# Altium PCB Microneedle_Patch_Mirrored_V2.PcbDoc
Units mm, origin at the board's own origin, x right, y up, seen from the top; angles counter-clockwise.
Board outline 28.75 x 93 mm, 2 copper layers (Top, Bottom), stack 0.137 mm thick; 33 components, 33 nets, 708 pads, 44 vias.
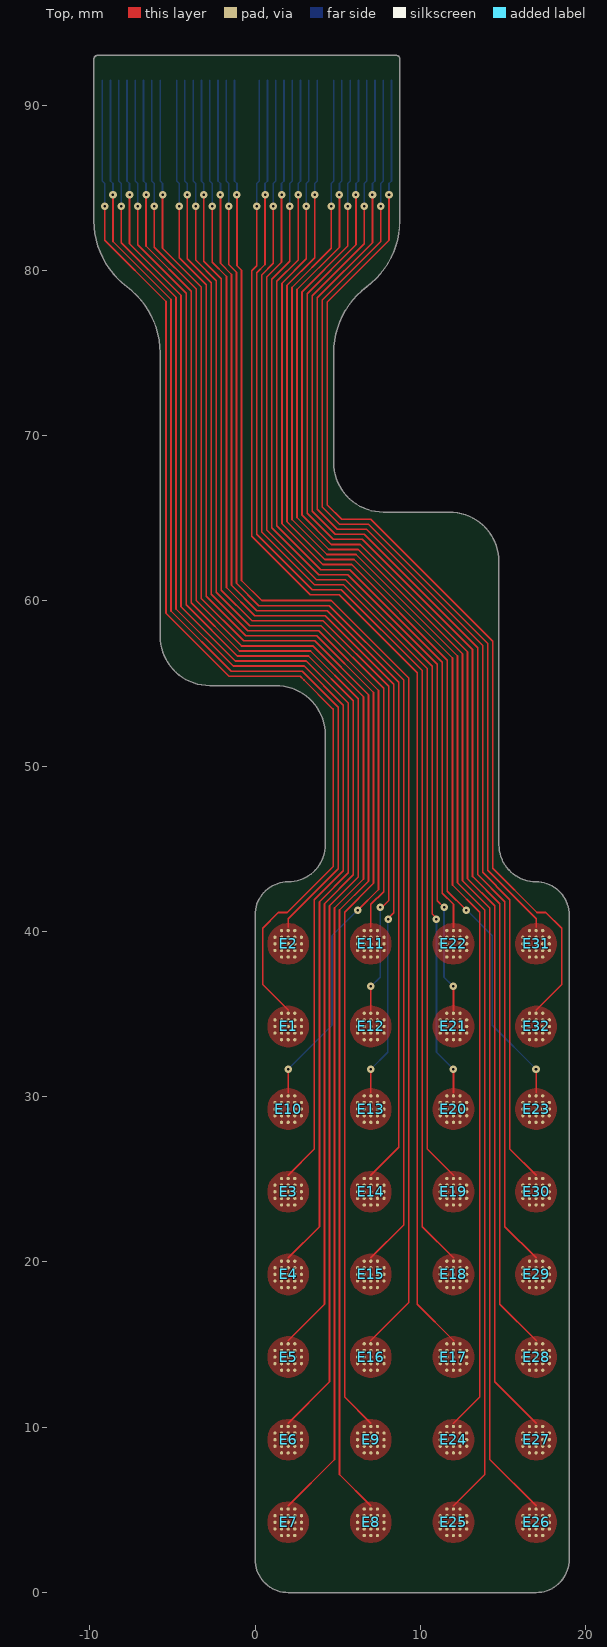
[diagram p0: Top view]
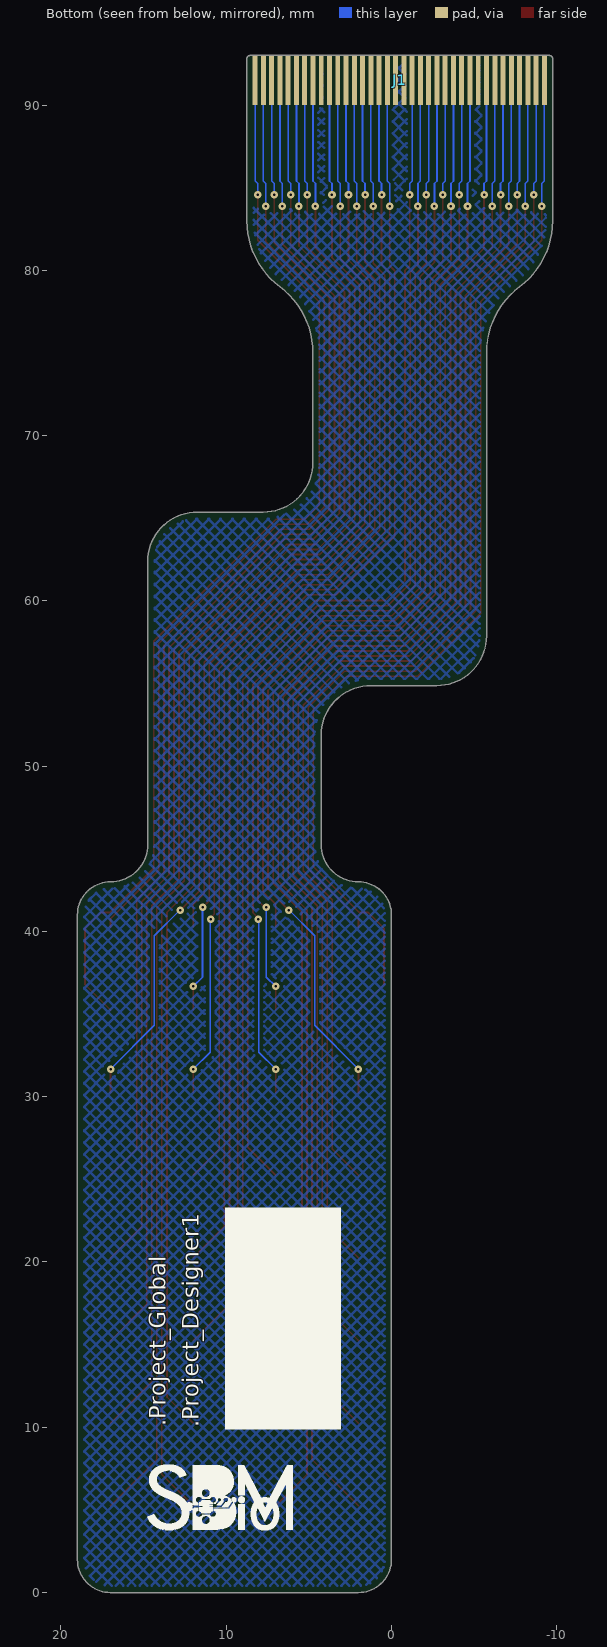
[diagram p1: Bottom view, seen from below]
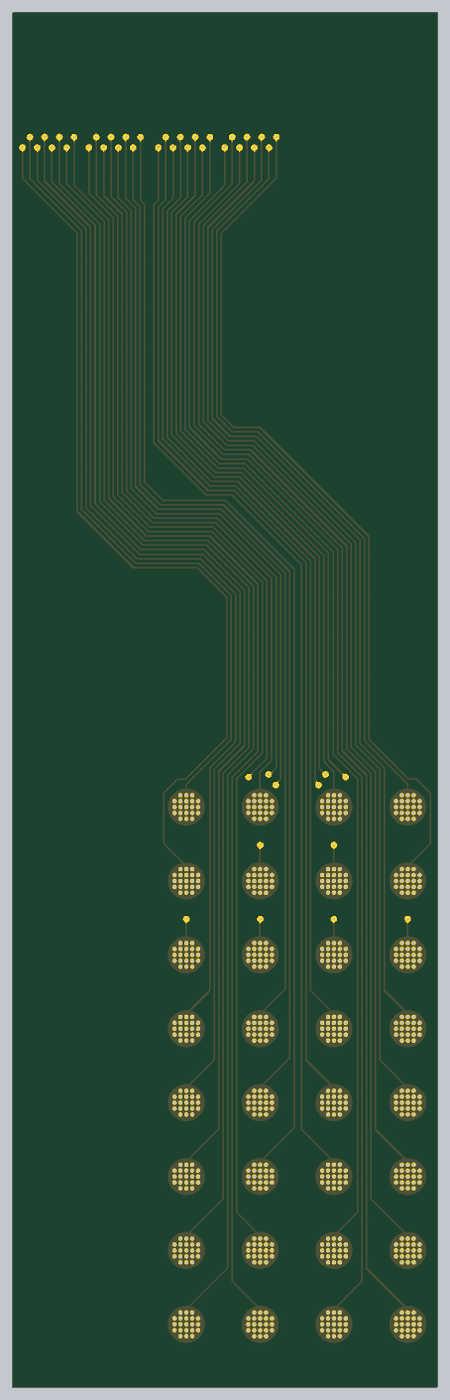
[diagram p2: 3D render of the assembled board from above, using the file's embedded part models]

## Layer stack, top to bottom
Board Layer Stack Top Coverlay: solder mask 0.025, Polymide, Dk 3.4
Adhesive 3: prepreg 0.025, Adhesive, Dk 3.3
Top: signal copper 0.018
Dielectric 1: core 0.013, Composite dielectric, Dk 3.3
Dielectric 3: core 0.025, Polymide, Dk 3.4
Dielectric 2: core 0.013, Composite dielectric, Dk 3.3
Bottom: signal copper 0.018
Adhesive 2: prepreg 0.025, Adhesive, Dk 3.3
Board Layer Stack Bottom Coverlay: solder mask 0.025, Polymide, Dk 3.4

## Board outline
2,0 cw(c2,2) 0,2 0,41 cw(c2,41) 2,43 ccw(c2,45.25) 4.25,45.25 4.25,51.875 ccw(c1.25,51.875) 1.25,54.875 -2.75,54.875 cw(c-2.75,57.875) -5.75,57.875 -5.75,75 ccw(c-10.75,75) -7.75,79 cw(c-4.75,83) -9.75,83 -9.75,92.8 cw(c-9.55,92.8) -9.55,93 8.55,93 cw(c8.55,92.8) 8.75,92.8 8.75,83 cw(c3.75,83) 6.75,79 ccw(c9.75,75) 4.75,75 4.75,68.375 ccw(c7.75,68.375) 7.75,65.375 11.75,65.375 cw(c11.75,62.375) 14.75,62.375 14.75,45.25 ccw(c17,45.25) 17,43 cw(c17,41) 19,41 19,2 cw(c17,2) 17,0

## Design rules (kind name [scope] priority, off if disabled: settings)
BoardOutlineClearance ZIF_BoardEdge [InPadClass('ZIF_Pads')] p1: gap=0.305 ignorepadtopadclearanceinfootprint=FALSE except(0: SMDPad-OutlineEdge)
BoardOutlineClearance [All] p2: gap=0.305 ignorepadtopadclearanceinfootprint=FALSE except(0: SMDPad-OutlineEdge)
Clearance [All] p1: gap=0.203 ignorepadtopadclearanceinfootprint=TRUE except(0.127: Arc-SMDPad Track-SMDPad SMDPad-SMDPad)
ComponentClearance [All] p1: gap=0.102 collisioncheckmode=3 verticalgap=0.102 showdistances=FALSE
HoleSize [All] p1: absolutevalues=TRUE maxlimit=25.4 minlimit=0.102 maxpercent=80.000 minpercent=20.000
HoleToHoleClearance [All] p1: gap=0.254 allowstackedmicrovias=FALSE
MinimumSolderMaskSliver [All] p1: minsoldermaskwidth=0.1
PlaneClearance [All] p1: clearance=0.152
PlaneConnect [All] p1: pad.planeconnectstyle=Relief pad.reliefexpansion=0.508 pad.reliefentries=4 pad.reliefconductorwidth=0.254 pad.reliefairgap=0.254 via.planeconnectstyle=Direct via.reliefexpansion=0.508 via.reliefentries=4 via.reliefconductorwidth=0.254 via.reliefairgap=0.254
PolygonConnect [All] p1: thpad.connectstyle=Relief thpad.reliefconductorwidth=0.254 thpad.reliefentries=4 thpad.polygonreliefangle="90 Angle" thpad.airgapwidth=0.254 smdpad.connectstyle=Direct smdpad.reliefconductorwidth=0.254 smdpad.reliefentries=4 smdpad.polygonreliefangle="90 Angle" smdpad.airgapwidth=0.254 via.connectstyle=Direct via.reliefconductorwidth=0.254 via.reliefentries=4 via.polygonreliefangle="90 Angle" via.airgapwidth=0.254
RoutingVias [All] p1: holewidth=0.152 width=0.457 viastyle="Through Hole" minholewidth=0.152 minwidth=0.457 maxholewidth=0.152 maxwidth=0.457
SilkToSilkClearance [All] p1: silktosilkclearance=0.102
SilkToSolderMaskClearance [IsPad] p1: minsilkscreentomaskgap=0.051 clearancetoexposedcopper=FALSE
SolderMaskExpansion [All] p1: expansion=0.051 istentingtop=FALSE
SupplyNets "Schematic Supply Nets" [InNet('GND')] p1: voltage=0.000
Width [All] p1: maxlimit=0.102 minlimit=0.102 preferedwidth=0.102 minimp=50.000000 maximp=50.000000 favimp=50.000000
22 further rules are at their usual default settings.

## Components (designator, comment, footprint, x,y, rotation, side; value= is the part's Value field where it differs from the comment)
E1 "UNeedle" UNeedle 2,34.25 r0 top
E2 "UNeedle" UNeedle 2,39.25 r0 top
E3 "UNeedle" UNeedle 2,24.25 r0 top
E4 "UNeedle" UNeedle 2,19.25 r0 top
E5 "UNeedle" UNeedle 2,14.25 r0 top
E6 "UNeedle" UNeedle 2,9.25 r0 top
E7 "UNeedle" UNeedle 2,4.25 r0 top
E8 "UNeedle" UNeedle 7,4.25 r0 top
E9 "UNeedle" UNeedle 7,9.25 r0 top
E10 "UNeedle" UNeedle 2,29.25 r0 top
E11 "UNeedle" UNeedle 7,39.25 r0 top
E12 "UNeedle" UNeedle 7,34.25 r0 top
E13 "UNeedle" UNeedle 7,29.25 r0 top
E14 "UNeedle" UNeedle 7,24.25 r0 top
E15 "UNeedle" UNeedle 7,19.25 r0 top
E16 "UNeedle" UNeedle 7,14.25 r0 top
E17 "UNeedle" UNeedle 12,14.25 r0 top
E18 "UNeedle" UNeedle 12,19.25 r0 top
E19 "UNeedle" UNeedle 12,24.25 r0 top
E20 "UNeedle" UNeedle 12,29.25 r90 top
E21 "UNeedle" UNeedle 12,34.25 r0 top
E22 "UNeedle" UNeedle 12,39.25 r90 top
E23 "UNeedle" UNeedle 17,29.25 r90 top
E24 "UNeedle" UNeedle 12,9.25 r90 top
E25 "UNeedle" UNeedle 12,4.25 r90 top
E26 "UNeedle" UNeedle 17,4.25 r90 top
E27 "UNeedle" UNeedle 17,9.25 r90 top
E28 "UNeedle" UNeedle 17,14.25 r90 top
E29 "UNeedle" UNeedle 17,19.25 r90 top
E30 "UNeedle" UNeedle 17,24.25 r90 top
E31 "UNeedle" UNeedle 17,39.25 r0 top
E32 "UNeedle" UNeedle 17,34.25 r90 top
J1 "3-2492104-6" Fingers_36POS -0.5,91.5 r0 bottom

## Footprints (in the part's own frame and the unit in brackets; to place one, negate y for a bottom-side part, rotate by r counter-clockwise, add the part's x,y. Pads: shape width x height; smd on the part's side, far side on the other; paste and mask are expansions set on the pad)
Fingers_36POS [mm]
  rect 0.3x3 smd mask+0: 1(-8.75,0) 2(-8.25,0) 3(-7.75,0) 4(-7.25,0) 5(-6.75,0) 6(-6.25,0) 7(-5.75,0) 8(-5.25,0) 9(-4.75,0) 10(-4.25,0) 11(-3.75,0) 12(-3.25,0) 13(-2.75,0) 14(-2.25,0) 15(-1.75,0) 16(-1.25,0) 17(-0.75,0) 18(-0.25,0) 19(0.25,0) 20(0.75,0) 21(1.25,0) 22(1.75,0) 23(2.25,0) 24(2.75,0) 25(3.25,0) 26(3.75,0) 27(4.25,0) 28(4.75,0) 29(5.25,0) 30(5.75,0) 31(6.25,0) 32(6.75,0) 33(7.25,0) 34(7.75,0) 35(8.25,0) 36(8.75,0)
UNeedle [mm]
  round 0.2 smd paste+0 mask+0.05: 1(-0.8,-0.4) 1(-0.8,0) 1(-0.8,0.4) 1(-0.4,-0.8) 1(-0.4,-0.4) 1(-0.4,0) 1(-0.4,0.4) 1(-0.4,0.8) 1(0,-0.8) 1(0,-0.4) 1(0,0) 1(0,0.4) 1(0,0.8) 1(0.4,-0.8) 1(0.4,-0.4) 1(0.4,0) 1(0.4,0.4) 1(0.4,0.8) 1(0.8,-0.4) 1(0.8,0) 1(0.8,0.4)
  body extent -0.82,-0.82 0.82,0.82, height 0.4

## Part data
J1: library part CON_FINGERS_36POS, GRAMS Lib Spec=2.7

## Via types
v1: diameter 0.457, hole 0.152, Top to Bottom, 44 vias

## Nets (pads, with @x,y where several pads share a name; then routed paths per layer and width w, separated by ;. In a path a pad name is that pad's centre, name@x,y a point inside that pad or via, vN(x,y) a via of type N, cw(c..) or ccw(c..) an arc to the next point about the centre after c; other vN are vias at no path point)
GND: J1.9 J1.18 J1.19 J1.28
Input1: E1.1 J1.1 | length 67.3
  Top w0.102: v1(-9.1,83.871) -9.1,81.814 -5.394,78.109 -5.394,59.261 -1.58,55.446 2.721,55.446 2.955,55.212 4.624,53.543 4.724,53.442 4.724,43.924 1.947,41.147 1.408,41.147 0.457,40.196 0.457,36.793 2,35.25
  Bottom w0.102: J1.1 -9.25,85.4 -9.1,85.25 v1(-9.1,83.871)
Input2: E2.1 J1.2 | length 60.7
  Top w0.102: v1(-8.6,84.582) -8.6,81.745 -5.09,78.235 -5.09,59.387 -1.454,55.751 2.847,55.751 5.03,53.568 5.03,43.799 2,40.769 2,40.25
  Bottom w0.102: J1.2 -8.75,85.4 -8.6,85.25 v1(-8.6,84.582)
Input3: E3.1 J1.3 | length 75.8
  Top w0.102: v1(-8.1,83.871) -8.1,81.677 -4.785,78.361 -4.785,59.513 -1.327,56.056 2.973,56.056 5.334,53.695 5.334,43.672 3.586,41.924 3.586,26.836 2,25.25
  Bottom w0.102: J1.3 -8.25,85.4 -8.1,85.25 v1(-8.1,83.871)
Input4: E4.1 J1.4 | length 80.8
  Top w0.102: v1(-7.6,84.582) -7.6,81.608 -4.48,78.488 -4.48,59.639 -1.201,56.36 3.1,56.36 5.639,53.821 5.639,43.546 3.89,41.797 3.89,22.14 2,20.25
  Bottom w0.102: J1.4 -7.75,85.4 -7.6,85.25 v1(-7.6,84.582)
Input5: E5.1 J1.5 | length 85.9
  Top w0.102: v1(-7.1,83.871) -7.1,81.539 -4.175,78.614 -4.175,59.766 -1.075,56.665 3.226,56.665 5.944,53.947 5.944,43.42 4.195,41.671 4.195,17.445 2,15.25
  Bottom w0.102: J1.5 -7.25,85.4 -7.1,85.25 v1(-7.1,83.871)
Input6: E6.1 J1.6 | length 90.9
  Top w0.102: v1(-6.6,84.582) -6.6,81.47 -3.87,78.74 -3.87,59.892 -0.949,56.97 3.352,56.97 6.249,54.073 6.249,43.294 4.5,41.545 4.5,12.75 2,10.25
  Bottom w0.102: J1.6 -6.75,85.4 -6.6,85.25 v1(-6.6,84.582)
Input7: E7.1 J1.7 | length 96
  Top w0.102: v1(-6.1,83.871) -6.1,81.401 -3.566,78.866 -3.566,60.018 -0.822,57.275 3.478,57.275 6.554,54.2 6.554,43.167 4.805,41.418 4.805,8.055 2,5.25
  Bottom w0.102: J1.7 -6.25,85.4 -6.1,85.25 v1(-6.1,83.871)
Input8: E8.1 J1.8 | length 95.5
  Top w0.102: v1(-5.6,84.582) -5.6,81.332 -3.261,78.993 -3.261,60.144 -0.696,57.58 3.605,57.58 6.858,54.326 6.858,43.041 5.11,41.292 5.11,7.14 7,5.25
  Bottom w0.102: J1.8 -5.75,85.4 -5.6,85.25 v1(-5.6,84.582)
Input9: E9.1 J1.10 | length 90.1
  Top w0.102: v1(-4.6,83.871) -4.6,80.763 -2.956,79.119 -2.956,60.271 -0.57,57.884 3.731,57.884 7.163,54.452 7.163,42.915 5.414,41.166 5.414,11.836 7,10.25
  Bottom w0.102: J1.10 -4.75,85.4 -4.6,85.25 v1(-4.6,83.871)
Input10: E10.1 J1.11 | length 70.9
  Top w0.102: v1(-4.1,84.582) -4.1,80.694 -2.651,79.245 -2.651,60.397 -0.444,58.189 3.857,58.189 7.468,54.578 7.468,42.537 v1(6.213,41.282) ; 2,30.25 2,31.667 v1(2.007,31.674)
  Bottom w0.102: J1.11 -4.25,85.4 -4.1,85.25 v1(-4.1,84.582) ; v1(2.007,31.674) 4.648,34.315 4.648,39.737 6.203,41.292 v1(6.213,41.282)
Input11: E11.1 J1.12 | length 58.9
  Top w0.102: v1(-3.6,83.871) -3.6,80.625 -2.346,79.371 -2.346,60.523 -0.317,58.494 3.983,58.494 7.773,54.705 7.773,42.411 7,41.638 7,40.25
  Bottom w0.102: J1.12 -3.75,85.4 -3.6,85.25 v1(-3.6,83.871)
Input12: E12.1 J1.13 | length 64
  Top w0.102: v1(-3.1,84.582) -3.1,80.556 -2.042,79.498 -2.042,60.649 -0.191,58.799 4.11,58.799 8.078,54.831 8.078,41.87 7.661,41.453 v1(7.569,41.453) ; 7,35.25 7,36.667 v1(7.007,36.674)
  Bottom w0.102: J1.13 -3.25,85.4 -3.1,85.25 v1(-3.1,84.582) ; v1(7.007,36.674) 7.569,37.236 v1(7.569,41.453)
Input13: E13.1 J1.14 | length 68.9
  Top w0.102: v1(-2.6,83.871) -2.6,80.487 -1.737,79.624 -1.737,60.812 -0.028,59.104 4.236,59.104 8.382,54.957 8.382,41.128 8.052,40.798 v1(8.052,40.742) ; 7,30.25 7,31.667 v1(7.007,31.674)
  Bottom w0.102: J1.14 -2.75,85.4 -2.6,85.25 v1(-2.6,83.871) ; v1(7.007,31.674) 8.026,32.694 8.026,40.716 v1(8.052,40.742)
Input14: E14.1 J1.15 | length 74
  Top w0.102: v1(-2.1,84.582) -2.1,80.418 -1.432,79.75 -1.432,60.938 0.098,59.408 4.362,59.408 8.687,55.083 8.687,26.937 7,25.25
  Bottom w0.102: J1.15 -2.25,85.4 -2.1,85.25 v1(-2.1,84.582)
Input15: E15.1 J1.16 | length 79
  Top w0.102: v1(-1.6,83.871) -1.6,80.349 -1.127,79.876 -1.127,61.065 0.224,59.713 4.488,59.713 8.992,55.21 8.992,51.562 8.992,22.242 7,20.25
  Bottom w0.102: J1.16 -1.75,85.4 -1.6,85.25 v1(-1.6,83.871)
Input16: E16.1 J1.17 | length 84
  Top w0.102: v1(-1.1,84.582) -1.1,80.28 -0.822,80.003 -0.822,61.233 0.392,60.018 4.615,60.018 9.297,55.336 9.297,51.562 9.297,17.547 7,15.25
  Bottom w0.102: J1.17 -1.25,85.4 -1.1,85.25 v1(-1.1,84.582)
Input17: E17.1 J1.20 | length 82.5
  Top w0.102: v1(0.1,83.871) 0.1,80.28 -0.207,79.973 -0.207,63.912 3.337,60.368 5.094,60.368 9.804,55.657 9.804,51.562 9.804,17.446 12,15.25
  Bottom w0.102: v1(0.1,83.871) 0.1,85.25 0.25,85.4 J1.20
Input18: E18.1 J1.21 | length 77.5
  Top w0.102: v1(0.6,84.582) 0.6,80.349 0.098,79.847 0.098,64.038 3.464,60.672 5.22,60.672 10.109,55.783 10.109,51.562 10.109,22.141 12,20.25
  Bottom w0.102: v1(0.6,84.582) 0.6,85.25 0.75,85.4 J1.21
Input19: E19.1 J1.22 | length 72.4
  Top w0.102: v1(1.1,83.871) 1.1,80.418 0.403,79.721 0.403,64.164 3.59,60.977 5.346,60.977 10.414,55.91 10.414,26.836 12,25.25
  Bottom w0.102: v1(1.1,83.871) 1.1,85.25 1.25,85.4 J1.22
Input20: E20.1 J1.23 | length 67.4
  Top w0.102: v1(1.6,84.582) 1.6,80.487 0.708,79.595 0.708,64.291 3.716,61.282 5.473,61.282 10.719,56.036 10.719,41.051 10.948,40.822 v1(10.948,40.742) ; 12,30.25 v1@12,31.667
  Bottom w0.102: v1(1.6,84.582) 1.6,85.25 1.75,85.4 J1.23 ; v1(10.948,40.742) 10.974,40.716 10.974,32.694 v1(11.993,31.674)
Input21: E21.1 J1.24 | length 62.3
  Top w0.102: v1(2.1,83.871) 2.1,80.556 1.012,79.468 1.012,64.417 3.842,61.587 5.599,61.587 11.024,56.162 11.024,41.86 v1(11.431,41.453) ; 12,35.25 v1@12,36.667
  Bottom w0.102: v1(2.1,83.871) 2.1,85.25 2.25,85.4 J1.24 ; v1(11.431,41.453) 11.431,37.236 v1(11.993,36.674)
Input22: E22.1 J1.25 | length 57.3
  Top w0.102: v1(2.6,84.582) 2.6,80.625 1.317,79.342 1.317,64.543 3.969,61.892 5.725,61.892 11.328,56.288 11.328,42.31 12,41.638 12,40.25
  Bottom w0.102: v1(2.6,84.582) 2.6,85.25 2.75,85.4 J1.25
Input23: E23.1 J1.26 | length 69.3
  Top w0.102: v1(3.1,83.871) 3.1,80.694 1.622,79.216 1.622,64.669 4.095,62.196 5.851,62.196 11.633,56.415 11.633,42.436 v1(12.787,41.282) ; 17,30.25 v1@17,31.667
  Bottom w0.102: v1(3.1,83.871) 3.1,85.25 3.25,85.4 J1.26 ; v1(12.787,41.282) 12.797,41.292 14.352,39.737 14.352,34.315 v1(16.993,31.674)
Input24: E24.1 J1.27 | length 88.5
  Top w0.102: v1(3.6,84.582) 3.6,80.763 1.927,79.09 1.927,64.796 4.221,62.501 5.978,62.501 11.938,56.541 11.938,42.814 13.586,41.166 13.586,11.836 12,10.25
  Bottom w0.102: v1(3.6,84.582) 3.6,85.25 3.75,85.4 J1.27
Input25: E25.1 J1.29 | length 93.9
  Top w0.102: v1(4.6,83.871) 4.6,81.332 2.232,78.963 2.232,64.922 4.347,62.806 6.104,62.806 12.243,56.667 12.243,42.94 13.89,41.292 13.89,7.14 12,5.25
  Bottom w0.102: v1(4.6,83.871) 4.6,85.25 4.75,85.4 J1.29
Input26: E26.1 J1.30 | length 94.4
  Top w0.102: v1(5.1,84.582) 5.1,81.401 2.536,78.837 2.536,65.048 4.474,63.111 6.23,63.111 12.548,56.793 12.548,43.066 14.195,41.418 14.195,8.055 17,5.25
  Bottom w0.102: v1(5.1,84.582) 5.1,85.25 5.25,85.4 J1.30
Input27: E27.1 J1.31 | length 89.3
  Top w0.102: v1(5.6,83.871) 5.6,81.47 2.841,78.711 2.841,65.174 4.6,63.416 6.356,63.416 12.852,56.92 12.852,43.192 14.5,41.545 14.5,12.75 17,10.25
  Bottom w0.102: v1(5.6,83.871) 5.6,85.25 5.75,85.4 J1.31
Input28: E28.1 J1.32 | length 84.3
  Top w0.102: v1(6.1,84.582) 6.1,81.539 3.146,78.585 3.146,65.301 4.726,63.72 6.483,63.72 13.157,57.046 13.157,43.319 14.805,41.671 14.805,17.445 17,15.25
  Bottom w0.102: v1(6.1,84.582) 6.1,85.25 6.25,85.4 J1.32
Input29: E29.1 J1.33 | length 79.3
  Top w0.102: v1(6.6,83.871) 6.6,81.608 3.451,78.458 3.451,65.427 4.852,64.025 6.609,64.025 13.462,57.172 13.462,43.445 15.11,41.797 15.11,22.14 17,20.25
  Bottom w0.102: v1(6.6,83.871) 6.6,85.25 6.75,85.4 J1.33
Input30: E30.1 J1.34 | length 74.2
  Top w0.102: v1(7.1,84.582) 7.1,81.677 3.756,78.332 3.756,65.553 4.979,64.33 6.735,64.33 13.767,57.298 13.767,43.571 15.414,41.924 15.414,26.836 17,25.25
  Bottom w0.102: v1(7.1,84.582) 7.1,85.25 7.25,85.4 J1.34
Input31: E31.1 J1.35 | length 59.2
  Top w0.102: v1(7.6,83.871) 7.6,81.745 4.06,78.206 4.06,65.679 5.105,64.635 6.861,64.635 14.072,57.425 14.072,43.697 17,40.769 17,40.25
  Bottom w0.102: v1(7.6,83.871) 7.6,85.25 7.75,85.4 J1.35
Input32: E32.1 J1.36 | length 65.7
  Top w0.102: v1(8.1,84.582) 8.1,81.814 4.365,78.08 4.365,65.806 5.231,64.94 6.988,64.94 14.376,57.551 14.376,43.824 17.053,41.147 17.592,41.147 18.543,40.196 18.543,36.793 17,35.25
  Bottom w0.102: v1(8.1,84.582) 8.1,85.25 8.25,85.4 J1.36

## Polygon pours and split planes (outlines as drawn)
Input8 on Top "Electrode8" (solid, pour order 31): 7,5.5 cw(c7,4.25) 8.25,4.25 cw(c7,4.25) 7,3 cw(c7,4.25) 5.75,4.25 cw(c7,4.25)
Input16 on Top "Electrode16" (solid, pour order 30): 7,15.5 cw(c7,14.25) 8.25,14.25 cw(c7,14.25) 7,13 cw(c7,14.25) 5.75,14.25 cw(c7,14.25)
Input17 on Top "Electrode17" (solid, pour order 29): 12,15.5 cw(c12,14.25) 13.25,14.25 cw(c12,14.25) 12,13 cw(c12,14.25) 10.75,14.25 cw(c12,14.25)
Input25 on Top "Electrode25" (solid, pour order 28): 12,5.5 cw(c12,4.25) 13.25,4.25 cw(c12,4.25) 12,3 cw(c12,4.25) 10.75,4.25 cw(c12,4.25)
Input26 on Top "Electrode26" (solid, pour order 27): 17,5.5 cw(c17,4.25) 18.25,4.25 cw(c17,4.25) 17,3 cw(c17,4.25) 15.75,4.25 cw(c17,4.25)
Input18 on Top "Electrode18" (solid, pour order 26): 12,20.5 cw(c12,19.25) 13.25,19.25 cw(c12,19.25) 12,18 cw(c12,19.25) 10.75,19.25 cw(c12,19.25)
Input15 on Top "Electrode15" (solid, pour order 25): 7,20.5 cw(c7,19.25) 8.25,19.25 cw(c7,19.25) 7,18 cw(c7,19.25) 5.75,19.25 cw(c7,19.25)
Input7 on Top "Electrode7" (solid, pour order 24): 2,5.5 cw(c2,4.25) 3.25,4.25 cw(c2,4.25) 2,3 cw(c2,4.25) 0.75,4.25 cw(c2,4.25)
Input6 on Top "Electrode6" (solid, pour order 23): 2,10.5 cw(c2,9.25) 3.25,9.25 cw(c2,9.25) 2,8 cw(c2,9.25) 0.75,9.25 cw(c2,9.25)
Input14 on Top "Electrode14" (solid, pour order 22): 7,25.5 cw(c7,24.25) 8.25,24.25 cw(c7,24.25) 7,23 cw(c7,24.25) 5.75,24.25 cw(c7,24.25)
Input19 on Top "Electrode19" (solid, pour order 21): 12,25.5 cw(c12,24.25) 13.25,24.25 cw(c12,24.25) 12,23 cw(c12,24.25) 10.75,24.25 cw(c12,24.25)
Input27 on Top "Electrode27" (solid, pour order 20): 17,10.5 cw(c17,9.25) 18.25,9.25 cw(c17,9.25) 17,8 cw(c17,9.25) 15.75,9.25 cw(c17,9.25)
Input28 on Top "Electrode28" (solid, pour order 19): 17,15.5 cw(c17,14.25) 18.25,14.25 cw(c17,14.25) 17,13 cw(c17,14.25) 15.75,14.25 cw(c17,14.25)
Input21 on Top "Electrode21" (solid, pour order 18): 12,35.5 cw(c12,34.25) 13.25,34.25 cw(c12,34.25) 12,33 cw(c12,34.25) 10.75,34.25 cw(c12,34.25)
Input13 on Top "Electrode13" (solid, pour order 17): 7,30.5 cw(c7,29.25) 8.25,29.25 cw(c7,29.25) 7,28 cw(c7,29.25) 5.75,29.25 cw(c7,29.25)
Input5 on Top "Electrode5" (solid, pour order 16): 2,15.5 cw(c2,14.25) 3.25,14.25 cw(c2,14.25) 2,13 cw(c2,14.25) 0.75,14.25 cw(c2,14.25)
Input4 on Top "Electrode4" (solid, pour order 15): 2,20.5 cw(c2,19.25) 3.25,19.25 cw(c2,19.25) 2,18 cw(c2,19.25) 0.75,19.25 cw(c2,19.25)
Input12 on Top "Electrode12" (solid, pour order 14): 7,35.5 cw(c7,34.25) 8.25,34.25 cw(c7,34.25) 7,33 cw(c7,34.25) 5.75,34.25 cw(c7,34.25)
Input20 on Top "Electrode20" (solid, pour order 13): 12,30.5 cw(c12,29.25) 13.25,29.25 cw(c12,29.25) 12,28 cw(c12,29.25) 10.75,29.25 cw(c12,29.25)
Input29 on Top "Electrode29" (solid, pour order 12): 17,20.5 cw(c17,19.25) 18.25,19.25 cw(c17,19.25) 17,18 cw(c17,19.25) 15.75,19.25 cw(c17,19.25)
Input30 on Top "Electrode30" (solid, pour order 11): 17,25.5 cw(c17,24.25) 18.25,24.25 cw(c17,24.25) 17,23 cw(c17,24.25) 15.75,24.25 cw(c17,24.25)
Input22 on Top "Electrode22" (solid, pour order 10): 12,40.5 cw(c12,39.25) 13.25,39.25 cw(c12,39.25) 12,38 cw(c12,39.25) 10.75,39.25 cw(c12,39.25)
Input11 on Top "Electrode11" (solid, pour order 9): 7,40.5 cw(c7,39.25) 8.25,39.25 cw(c7,39.25) 7,38 cw(c7,39.25) 5.75,39.25 cw(c7,39.25)
Input3 on Top "Electrode3" (solid, pour order 8): 2,25.5 cw(c2,24.25) 3.25,24.25 cw(c2,24.25) 2,23 cw(c2,24.25) 0.75,24.25 cw(c2,24.25)
Input2 on Top "Electrode2" (solid, pour order 7): 2,40.5 cw(c2,39.25) 3.25,39.25 cw(c2,39.25) 2,38 cw(c2,39.25) 0.75,39.25 cw(c2,39.25)
Input10 on Top "Electrode10" (solid, pour order 6): 2,30.5 cw(c2,29.25) 3.25,29.25 cw(c2,29.25) 2,28 cw(c2,29.25) 0.75,29.25 cw(c2,29.25)
Input23 on Top "Electrode23" (solid, pour order 5): 17,30.5 cw(c17,29.25) 18.25,29.25 cw(c17,29.25) 17,28 cw(c17,29.25) 15.75,29.25 cw(c17,29.25)
Input31 on Top "Electrode31" (solid, pour order 4): 17,40.5 cw(c17,39.25) 18.25,39.25 cw(c17,39.25) 17,38 cw(c17,39.25) 15.75,39.25 cw(c17,39.25)
Input1 on Top "Electrode1" (solid, pour order 3): 2,35.5 cw(c2,34.25) 3.25,34.25 cw(c2,34.25) 2,33 cw(c2,34.25) 0.75,34.25 cw(c2,34.25)
Input9 on Top "Electrode9" (solid, pour order 2): 7,10.5 cw(c7,9.25) 8.25,9.25 cw(c7,9.25) 7,8 cw(c7,9.25) 5.75,9.25 cw(c7,9.25)
Input24 on Top "Electrode24" (solid, pour order 1): 12,10.5 cw(c12,9.25) 13.25,9.25 cw(c12,9.25) 12,8 cw(c12,9.25) 10.75,9.25 cw(c12,9.25)
Input32 on Top "Electrode32" (solid, pour order 0): 17,35.5 cw(c17,34.25) 18.25,34.25 cw(c17,34.25) 17,33 cw(c17,34.25) 15.75,34.25 cw(c17,34.25)
GND on Bottom "GND_BOT" (hatched 45Degree grid 0.508 track 0.152, remove dead copper, pour order 32): 10,93.675 -12.497,93.675 -12.497,79.908 -8.839,76.251 -8.839,57.099 -6.35,54.61 2.083,54.61 4.064,52.629 4.064,44.196 3.099,43.231 0.914,43.231 -0.051,42.266 -0.051,1.168 1.168,-0.051 18.948,-0.051 18.948,9.296 18.948,42.012 14.801,46.159 14.801,63.736 11.684,66.853 8.397,66.853 5.75,69.5 5.75,74.75 10,79

## Silkscreen, mask and mechanical layers (free items; w line width, h text height)
Bottom Overlay:
  drawing of 10 lines, arcs and shapes, not listed
  text ".Project_Global" at 13.65,10.05 h1 r270
  text ".Project_Designer1" at 11.675,10 h1 r270
Board Outline:
  the board outline again, w0.2
Stiffener Top:
  lines w0.2: -9.75,87 8.75,87 8.75,92.8 ccw(c8.55,92.8) 8.55,93 -9.55,93 ccw(c-9.55,92.8) -9.75,92.8 -9.75,87